# EAGLE board 3x3 (EAGLE 9.6.2)
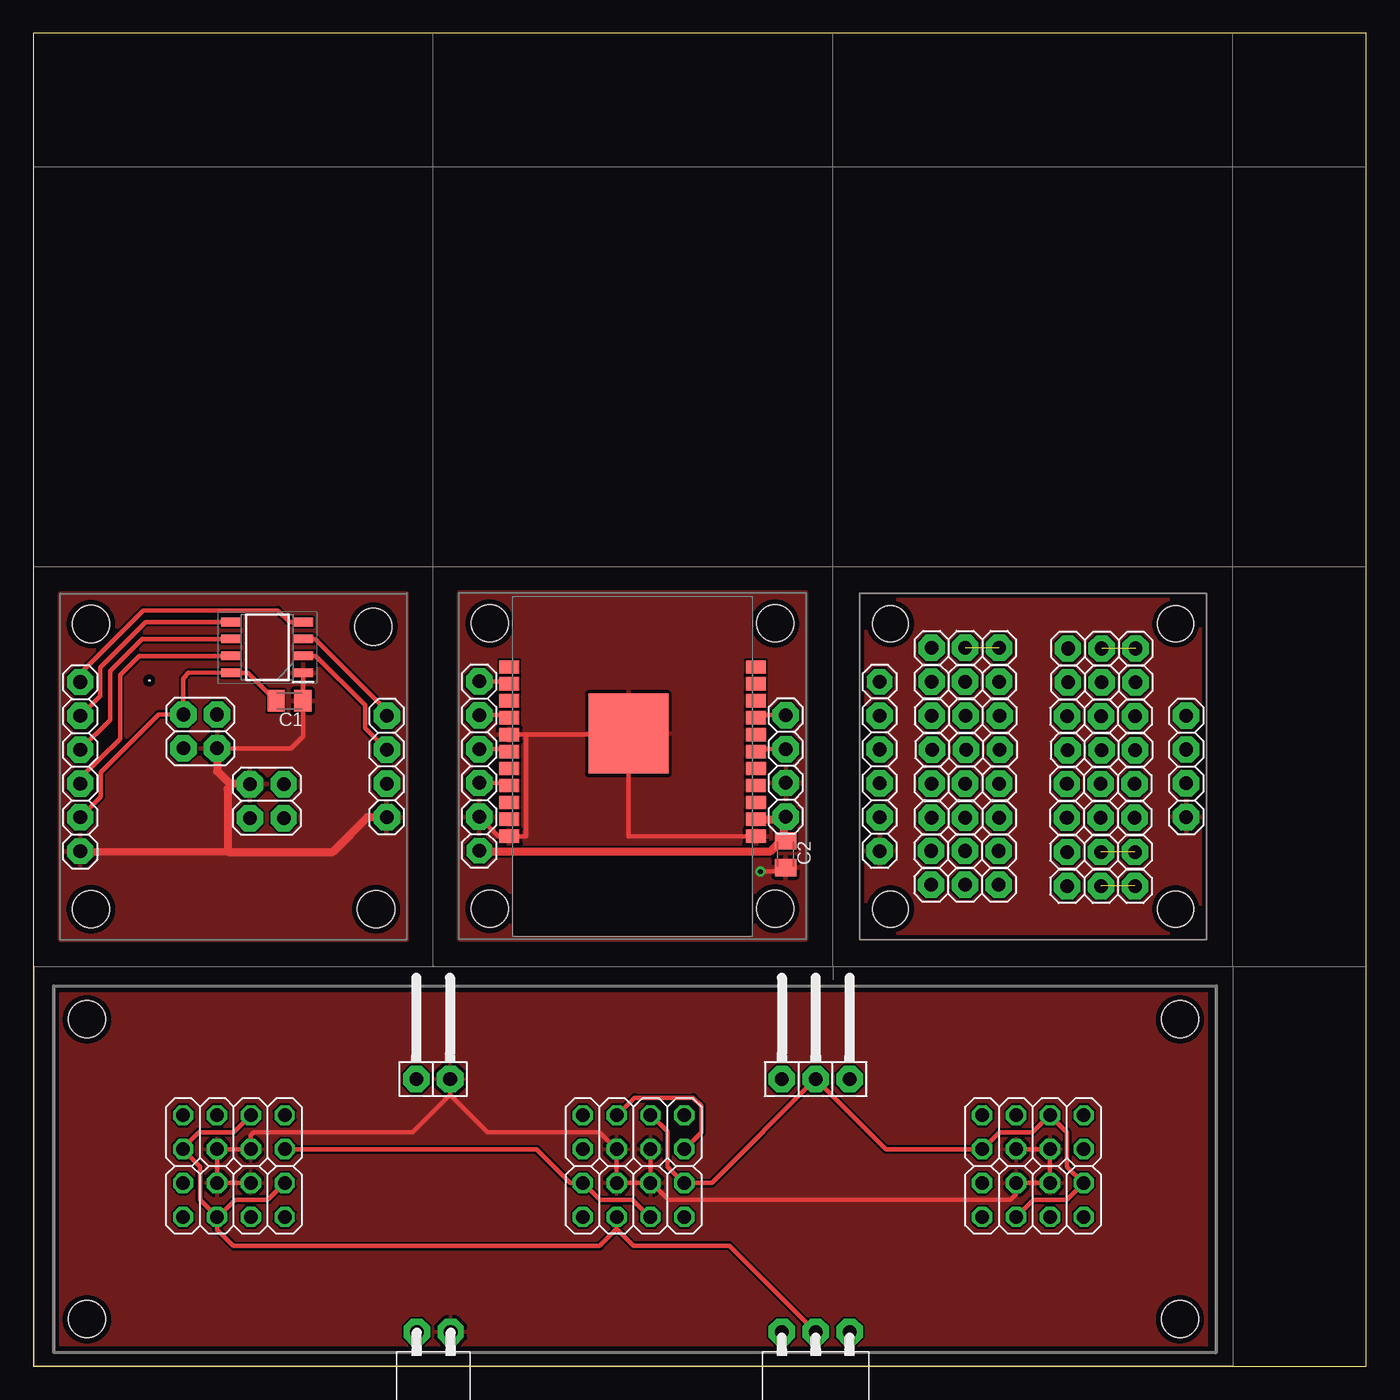
[diagram p0: board, top side]
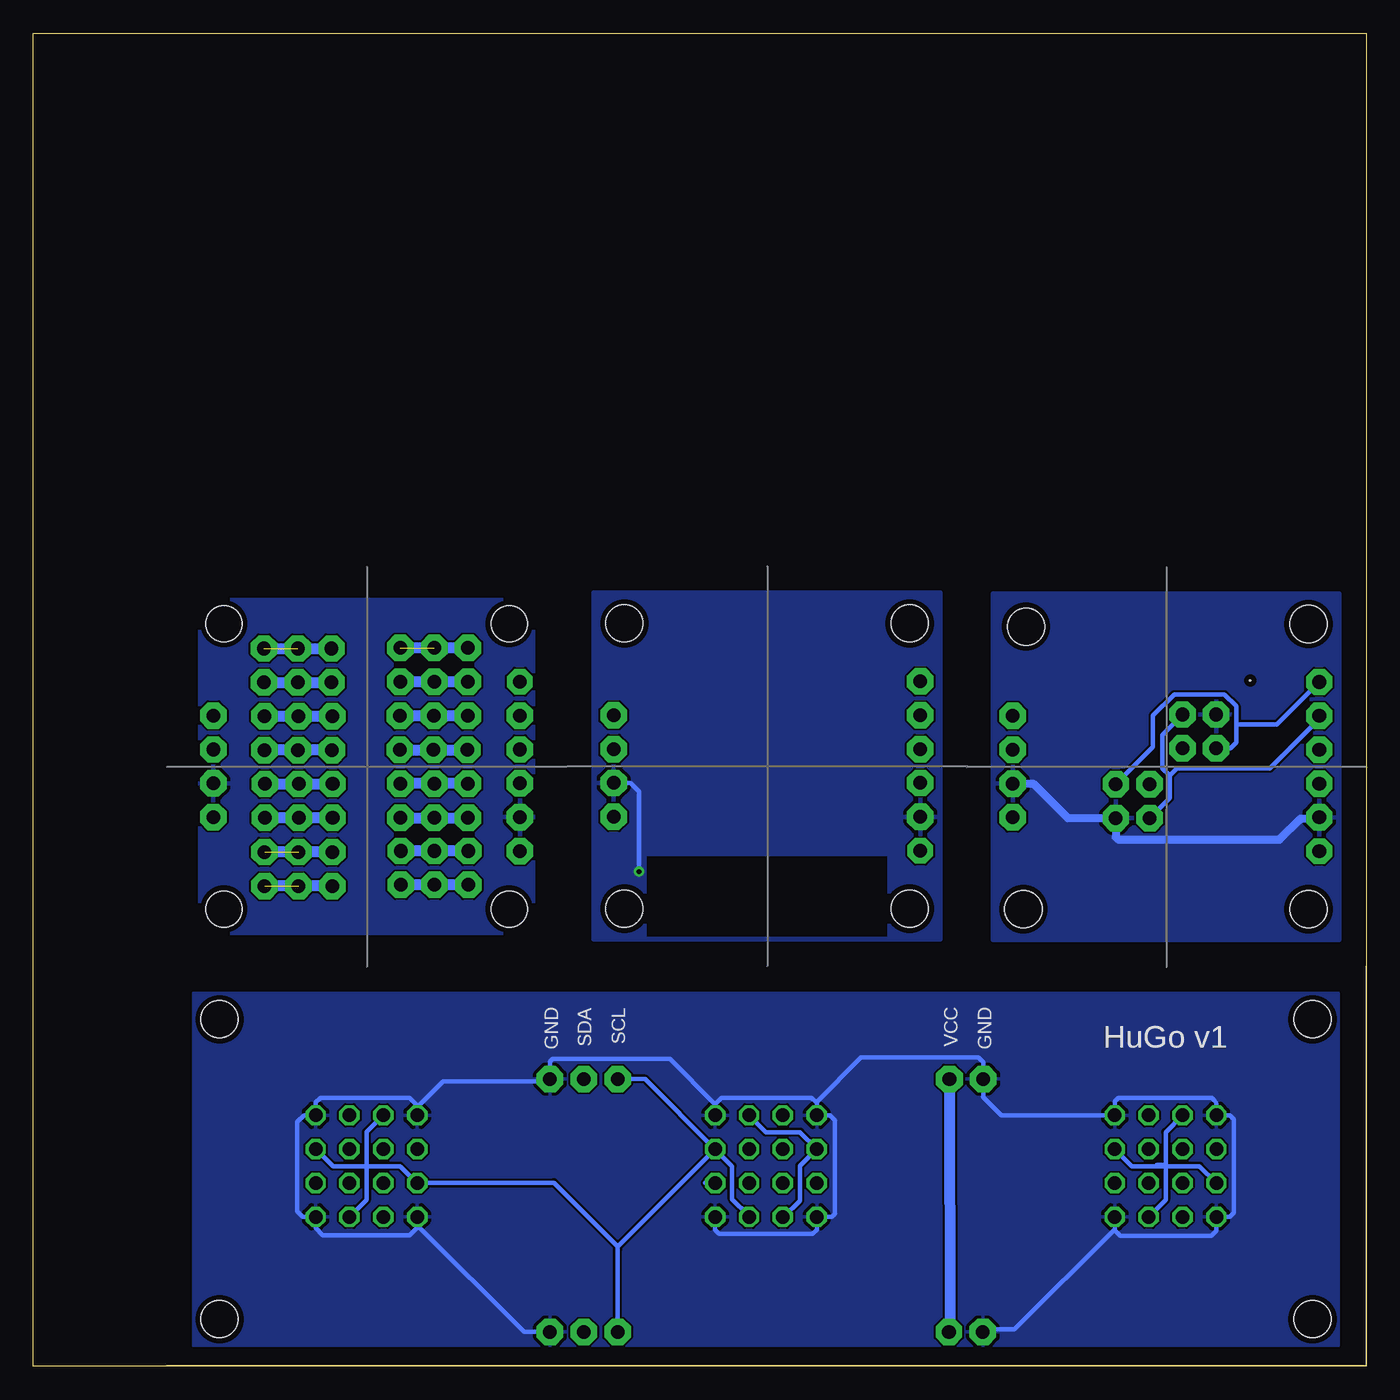
[diagram p1: board, bottom side, seen from below]

Size 100 x 100 mm. Coordinates in mm from the lower left corner, seen from the top.
Outline: 90.03,0.03 0.03,0.03 0.03,30.02
Outline: 0,0 100,0 100,100 0,100 0,0
Copper layers (1*16): Top 0.035mm / dielectric 1.5mm / Bottom 0.035mm
Design rules "default *": minimum track width 6mil, minimum drill 0.35mm, track to track 6mil, track to pad 6mil, pad to pad 6mil, via to via 6mil, smd to smd 6mil, copper to edge 16mil, drill to drill 6mil, minimum pad ring 10mil, minimum via ring 8mil, stop-mask expansion 4mil, vias tented up to drill 0mil, thermal gap 10mil
Holes 2.8 mm at 86.03,3.53 86.03,26.03 4.03,26.03 4.03,3.53 4.32,34.28 25.52,55.48 25.72,34.28 4.32,55.68 34.25,34.33 55.65,55.73 55.65,34.33 34.25,55.73
Holes 0.08 mm at 8.7,51.44
Holes 2.7 mm at 64.3,34.3 85.7,55.7 85.7,34.3 64.3,55.7

## Footprints (pad centres in the part's own frame; a part is rotated, then mirrored left to right if it is on the bottom)
C0805K = smd 1.3 x 1.6: 1 -1,0; 2 1,0
SOIC127P600X175-8N = smd 1.5 x 0.65: 1 -2.7,1.905; 2 -2.7,0.635; 3 -2.7,-0.635; 4 -2.7,-1.905; 5 2.7,-1.905; 6 2.7,-0.635; 7 2.7,0.635; 8 2.7,1.905
2X04 = drill 1.016 octagon: 1 -3.81,-1.27; 2 -3.81,1.27; 3 -1.27,-1.27; 4 -1.27,1.27; 5 1.27,-1.27; 6 1.27,1.27; 7 3.81,-1.27; 8 3.81,1.27
1X02/90 = drill 1.016 pad 1.981 octagon: 1 -1.27,-3.81 | drill 1.016 pad 2.007 octagon: 2 1.27,-3.81
1X03/90 = drill 1.016 pad 1.981 octagon: 1 -2.54,-3.81; 2 0,-3.81; 3 2.54,-3.81
1X03/90F = drill 1.016 pad 1.981 octagon: 1 -2.54,0; 2 0,0; 3 2.54,0
1X02/90F = drill 1.016 pad 1.981 octagon: 1 -1.31,0; 2 1.23,0
1X04 = drill 1.016 pad 1.981 octagon: 1 -3.81,0; 2 -1.27,0; 3 1.27,0; 4 3.81,0
1X06 = drill 1.016 pad 1.93 octagon: 1 -6.35,0 | drill 1.016 pad 1.981 octagon: 2 -3.81,0; 3 -1.27,0; 4 1.27,0; 5 3.81,0; 6 6.35,0
2X02 = drill 1.016 pad 1.981 octagon: 1 -1.27,-1.27; 2 -1.27,1.27; 3 1.27,-1.27; 4 1.27,1.27
1X03 = drill 1.016 pad 1.981 octagon: 1 -2.54,0; 2 0,0; 3 2.54,0
ESP-WROOM-32-TINY-BLOCK = smd 1.5 x 1: 1 -9.25,8.27; 2 -9.25,7; 3 -9.25,5.73; 4 -9.25,4.46; 5 -9.25,3.19; 6 -9.25,1.92; 7 -9.25,0.65; 8 -9.25,-0.62; 9 -9.25,-1.89; 10 -9.25,-3.16; 11 -9.25,-4.43; 28 9.25,-4.43; 29 9.25,-3.16; 30 9.25,-1.89; 31 9.25,-0.62; 32 9.25,0.65; 33 9.25,1.92; 34 9.25,3.19; 35 9.25,4.46; 36 9.25,5.73; 37 9.25,7; 38 9.25,8.27 | smd 6 x 6: GND 0.3,0.57

## Placement (x,y rotation side)
C1  [C0805K]  19.22,49.91 180 top
C2  [C0805K]  56.44,38.4 270 top
IC1  ATTINY412-SSN  [SOIC127P600X175-8N]  17.56,53.93 180 top
JP1  [2X04]  15.05,17.55 180 top
JP2  [2X04]  15.05,12.47 180 top
JP3  [2X04]  45.03,17.55 180 top
JP4  [2X04]  45.03,12.47 180 top
JP5  [2X04]  75.01,17.55 180 top
JP6  [2X04]  75.01,12.47 180 top
JP7  [1X02/90]  30,25.35 0 top
JP8  [1X03/90]  58.7,25.35 0 top
JP9  [1X03/90F]  58.7,2.57 180 top
JP10  [1X02/90F]  30,2.57 180 top
JP11  [1X04]  26.52,44.98 270 top
JP12  [1X06]  3.52,44.98 90 top
JP13  [2X02]  17.51,42.4 270 top
JP14  [2X02]  12.52,47.62 270 top
JP15  [1X04]  56.45,45.03 270 top
JP16  [1X06]  33.45,45.03 90 top
JP17  [1X04]  86.5,45 90 top
JP18  [1X06]  63.5,45 270 top
JP19  [1X03]  69.92,51.35 0 top
JP20  [1X03]  80.16,51.3 0 top
JP21  [1X03]  69.95,48.79 0 top
JP22  [1X03]  80.11,48.76 0 top
JP23  [1X03]  69.98,46.25 0 top
JP24  [1X03]  80.14,46.22 0 top
JP25  [1X03]  69.92,43.71 0 top
JP26  [1X03]  80.08,43.68 0 top
JP27  [1X03]  69.92,41.14 0 top
JP28  [1X03]  80.08,41.14 0 top
JP29  [1X03]  69.9,38.65 0 top
JP30  [1X03]  69.9,36.11 0 top
JP31  [1X03]  80.11,38.58 0 top
JP32  [1X03]  80.11,36.01 0 top
JP33  [1X03]  69.92,53.89 0 top
JP34  [1X03]  80.16,53.84 0 top
U$1  ESP-WROOM-32-TINY-BLOCK  [ESP-WROOM-32-TINY-BLOCK]  44.95,48.03 180 top

## Library data of the parts
C1 C2 = rcl; SPICEPREFIX: C
IC1 = ATTINY412-SSN; DESCRIPTION: 8-bit Microcontrollers - MCU 20MHz, 4KB, SOIC8, Ind 105C, Green, Tube; HEIGHT: 1.75mm; MANUFACTURER_NAME: Microchip; MANUFACTURER_PART_NUMBER: ATTINY412-SSN; MOUSER_PART_NUMBER: 579-ATTINY412-SSN; MOUSER_PRICE-STOCK: https://www.mouser.co.uk/ProductDetail/Microchip-Technology/ATTINY412-SSN?qs=3HJ2avRr9PItQG9ZsCamPQ%3D%3D
JP1-JP34 = pinhead2
U$1 = esp32

## Nets
GND: JP1.1 JP1.7 JP2.2 JP2.8 JP3.1 JP3.7 JP4.2 JP4.8 JP5.1 JP5.7 JP6.2 JP6.8 JP7.1 JP8.3 JP9.1 JP10.2
GND1: C1.2 IC1.8 JP11.3 JP12.2 JP13.4 JP14.1
GND2: C2.2 JP15.3 JP16.2 U$1.1 U$1.32 U$1.38 U$1.GND
GND3: JP17.2 JP18.5
N$1: JP33.1 JP33.2 JP33.3
N$2: JP31.1 JP31.2 JP31.3
N$3: JP29.1 JP29.2 JP29.3
N$4: JP27.1 JP27.2 JP27.3
N$5: JP25.1 JP25.2 JP25.3
N$6: JP23.1 JP23.2 JP23.3
N$7: JP21.1 JP21.2 JP21.3
N$8: JP19.1 JP19.2 JP19.3
N$9: JP20.1 JP20.2 JP20.3
N$10: JP22.1 JP22.2 JP22.3
N$11: JP24.1 JP24.2 JP24.3
N$12: JP26.1 JP26.2 JP26.3
N$13: JP28.1 JP28.2 JP28.3
N$14: JP30.1 JP30.2 JP30.3
N$15: JP32.1 JP32.2 JP32.3
N$16: JP34.1 JP34.2 JP34.3
P0: IC1.2 JP11.2
P1: IC1.3 JP11.1
P2: JP15.2 U$1.6
P3: JP15.1 U$1.8
P4: IC1.7 JP12.3
P5: JP16.3 U$1.35
SCL: JP1.2 JP1.5 JP2.4 JP2.7 JP3.2 JP3.5 JP4.4 JP4.7 JP5.2 JP5.5 JP6.4 JP6.7 JP8.1 JP9.3
SCL1: IC1.5 JP12.5 JP13.3 JP14.2
SCL2: JP16.5 U$1.31
SDA: JP1.3 JP1.8 JP2.1 JP2.6 JP3.3 JP3.8 JP4.1 JP4.6 JP5.3 JP5.8 JP6.1 JP6.6 JP8.2 JP9.2
SDA1: IC1.4 JP12.6 JP13.2 JP14.3
SDA2: JP16.6 U$1.29
UPDI: IC1.6 JP12.4
UPDI1: JP16.4 U$1.33
VCC: JP1.4 JP1.6 JP2.3 JP2.5 JP3.4 JP3.6 JP4.3 JP4.5 JP5.4 JP5.6 JP6.3 JP6.5 JP7.2 JP10.1
VCC1: C2.1 JP15.4 JP16.1 U$1.2
VCC2: JP17.1 JP18.6
VDD: C1.1 IC1.1 JP11.4 JP12.1 JP13.1 JP14.4

## Tracks (layer width: path | path; a pad name or v marks a point on that pad's centre or on a via)
GND
  Bottom 0.356: JP3.7 41.22,19.76 41.6,20.14 48.36,20.14 48.84,19.66 | JP3.7 40.23,18.82 39.85,18.44 39.85,11.43 40.08,11.2 JP4.8 41.22,10.24 41.53,9.93 48.54,9.93 48.84,10.24 JP4.2 | JP10.2 28.68,2.77 26.39,2.77 18.87,10.29 18.86,10.33 JP2.2 18.86,10.2 18.44,9.78 11.63,9.78 11.24,10.17 JP2.8 10.22,11.2 9.93,11.49 9.93,18.53 10.22,18.82 JP1.7 11.24,19.71 11.39,19.95 11.58,20.14 18.59,20.14 18.86,19.88 JP1.1 27.36,18.82 28.75,20.22 28.73,20.22 JP7.1 28.7,22.78 29.08,23.16 37.9,23.16 41.22,19.84 JP3.7 | JP3.1 48.84,19.66 | 48.84,19.66 52.25,23.06 61.04,23.06 61.24,22.86 JP8.3 61.24,21.36 69.24,21.36 71.2,19.41 JP5.7 71.2,19.56 71.78,20.14 78.46,20.14 78.82,19.79 JP5.1 79.68,18.82 80.19,18.31 80.19,11.61 79.78,11.2 JP6.2 78.82,10.36 78.28,9.83 71.75,9.83 71.2,10.39 JP6.8 71.2,10.57 63.2,2.56 JP9.1
  pour Bottom: 2.03,27.99 88.06,27.99 88.06,1.55 2.03,1.55
GND1
  Top 0.356: 14.84,52 11.66,52.03 11.25,51.61 JP14.1 9.39,48.89 5.04,44.54 5.04,42.7 JP12.2 | C1.2 16.11,52.02 IC1.8
  Top 0.61: IC1.8 14.84,52
  Bottom 0.61: JP11.3 24.98,43.71 24.98,43.72 22.39,41.13 JP13.4 18.78,39.69 18.59,39.5 6.5,39.5 4.92,41.09 3.56,41.09 JP12.2
  pour Bottom: 2.02,57.98 2.02,31.98 28.02,31.98 28.02,57.98
GND2  (via drill 0.35)
  Top 0.356: U$1.1 44.65,39.76 U$1.GND 44.65,47.38 U$1.32 36.96,47.38 36.96,39.76 U$1.38 34.91,39.76 JP16.2 | v54.56,37.11 56.14,37.11 C2.2
  Top 0.61: 54.58,37.12 v54.56,37.11
  Bottom 0.356: v54.56,37.11 54.56,43.13 55.18,43.76 JP15.3
  pour Top: 31.95,58.03 57.95,58.03 57.95,32.03 31.95,32.03
  pour Bottom: 31.95,58.03 57.95,58.03 57.95,32.03 31.95,32.03
GND3
  pour Bottom: 62.5,57.5 62.5,32.5 87.5,32.5 87.5,57.5
N$1  (1 unrouted)
  Bottom 0.813: JP33.1 JP33.3
N$2  (1 unrouted)
  Bottom 0.813: JP31.1 JP31.3
N$3
  Bottom 0.813: JP29.1 JP29.2 JP29.3
N$4
  Bottom 0.813: JP27.3 JP27.2 JP27.1
N$5
  Bottom 0.813: JP25.1 JP25.2 JP25.3
N$6
  Bottom 0.813: JP23.3 JP23.2 JP23.1
N$7
  Bottom 0.813: JP21.1 JP21.2 JP21.3
N$8
  Bottom 0.813: JP19.3 JP19.2 JP19.1
N$9
  Bottom 0.813: JP20.3 JP20.2 JP20.1
N$10
  Bottom 0.813: JP22.3 JP22.2 JP22.1
N$11
  Bottom 0.813: JP24.1 JP24.2 JP24.3
N$12
  Bottom 0.813: JP26.3 JP26.2 JP26.1
N$13
  Bottom 0.813: JP28.1 JP28.2 JP28.3
N$14
  Bottom 0.813: JP30.1 JP30.2 JP30.3
N$15  (1 unrouted)
  Bottom 0.813: JP32.1 JP32.3
N$16  (1 unrouted)
  Bottom 0.813: JP34.3 JP34.1
P0
  Top 0.356: JP11.2 24.89,47.88 24.89,49.6 21.18,53.29 IC1.2
P1
  Top 0.356: IC1.3 21.14,54.56 26.52,49.18 JP11.1
P2
  Top 0.356: JP15.2 54.39,46.3 U$1.6
P3
  Top 0.356: JP15.1 54.39,48.84 U$1.8
P4
  Top 0.356: JP12.3 3.52,44.14 6.53,47.06 6.53,51.87 7.95,53.29 IC1.7
P5
  Top 0.356: JP16.3 35.51,43.76 U$1.35
SCL
  Top 0.356: JP4.4 46.18,11.25 44.96,12.47 42.52,12.47 41.25,13.74 JP4.7 | JP3.5 43.79,18.82 45.11,20.14 49.51,20.14 50.11,19.53 50.11,17.55 JP3.2 | 41.17,13.74 40.28,13.74 37.74,16.28 JP1.2 | 41.17,13.74 JP4.7 | JP4.7 41.22,13.69 | 41.17,13.63 41.17,13.74
  Bottom 0.356: 71.35,13.74 JP6.7 | JP5.5 73.76,18.82 75.01,17.58 75.01,15.01 | 75.01,15.01 77.52,15.01 78.74,16.23 JP5.2 | JP4.4 46.35,11.3 47.57,12.52 47.57,15.01 JP3.2 | JP2.7 12.51,15.01 15.79,15.01 | JP1.5 15.05,17.55 15.05,15.09 | JP2.4 15.05,12.47 15.05,15.09 | 15.79,15.01 15.72,15.09 15.05,15.09 | JP1.2 17.59,15.01 15.79,15.01 | JP6.4 75.01,12.47 75.01,15.01 | JP6.7 71.23,13.74 72.5,15.01 75.01,15.01 | 56.16,8.77 JP9.3 56.16,8.97 | JP6.7 71.17,13.77 60.95,13.77 56.16,8.98 56.16,8.97 | JP8.1 54.1,21.54 JP3.2 | JP3.2 56.16,8.97
SCL1
  Top 0.356: 14.82,55.78 IC1.5 8.43,55.83 5.02,52.42 5.02,50.29 JP12.5
  Bottom 0.356: JP14.2 13.79,48.85 15.29,47.36 15.29,44.84 14.74,44.3 | JP13.3 14.74,42.62 14.74,44.3 | 14.74,44.3 14.19,44.86 7.22,44.86 3.52,48.56 JP12.5
SCL2
  Top 0.356: JP16.5 35.7,48.84 U$1.31
SDA
  Top 0.356: JP6.6 75.03,12.47 77.55,12.47 JP6.1 78.77,13.74 77.55,14.97 77.55,17.55 JP5.3 76.24,18.82 74.97,17.55 72.47,17.55 JP5.8 63.96,16.28 JP8.2 50.9,13.74 JP4.1 48.79,13.74 47.57,14.96 47.57,17.6 46.35,18.82 JP3.3 | 43.76,10.34 JP4.6 43.76,10.29 | JP2.6 13.78,10.24 15.01,9.02 42.49,9.02 43.76,10.29 | JP2.1 17.59,12.47 15.13,12.47 13.86,11.2 JP2.6 | JP2.6 12.51,12.47 12.51,14.95 11.24,16.22 JP1.8 11.24,16.38 12.41,17.55 15.05,17.55 JP1.3 | 43.76,10.29 45.02,9.04 52.22,9.04 JP9.2
  Bottom 0.356: 13.8,11.21 JP2.6 | 49.61,13.74 JP4.1 | JP4.6 43.71,11.2 42.49,12.42 42.49,15.04 41.25,16.28 JP3.8 41.22,16.3 42.48,17.55 45.03,17.55 JP3.3
SDA1
  Top 0.356: JP12.6 3.52,51.97 8.25,56.71 18.34,56.71 19.21,55.83 IC1.4
  Bottom 0.356: 9.75,48.77 9.75,49.52 10.63,50.39 14.41,50.39 16,48.8 16,46.45 JP13.2 | 9.75,48.77 9.75,48.27 | 9.75,48.27 9.75,46.8 10.2,46.35 JP14.3 | 9.73,48.79 9.75,48.77 | JP12.6 6.71,48.14 9.62,48.14 9.75,48.27
SDA2
  Top 0.356: JP16.6 35.7,51.38 U$1.29
UPDI
  Top 0.356: JP12.4 5.75,48.49 5.75,52.15 8.18,54.56 IC1.6
UPDI1
  Top 0.356: JP16.4 35.7,46.3 U$1.33
VCC
  Top 0.356: JP2.3 JP2.5 JP1.6 JP1.4 16.32,17.32 16.55,17.55 28.47,17.55 31.27,20.34 | 31.27,20.34 31.28,20.36 | 31.27,20.34 JP7.2 | JP5.6 JP5.4 JP6.3 JP6.5 73.74,12.9 73.3,12.47 47.65,12.47 46.38,13.74 JP4.3 | JP4.3 JP4.5 JP3.6 42.49,17.55 34.07,17.55 31.27,20.34 | JP4.3 JP3.4
  Bottom 0.406: 31.24,2.64 JP10.1
  Bottom 0.813: JP7.2 31.24,2.64
  pour Top: 2.03,27.99 88.06,27.99 88.06,1.55 2.03,1.55
VCC1
  Top 0.152: C2.1 56.44,41.03 56.26,41.03
  Top 0.356: 54.39,41.22 U$1.2
  Top 0.61: U$1.2 56.26,41.03 JP15.4 56.33,41.09 56.33,39.66 55.29,38.62 33.67,38.62 33.62,38.68 JP16.1
VCC2
  pour Top: 62.5,57.5 62.5,32.5 87.5,32.5 87.5,57.5
VDD
  Top 0.356: IC1.1 20.26,50.09 | JP14.4 19.34,46.35 20.23,47.25 20.23,49.66 20.21,49.68 C1.1
  Top 0.61: 20.26,50.09 20.23,50.06 20.23,49.66 | 13.79,46.4 JP14.4 13.79,44.65 14.78,43.67 JP13.1 14.92,43.67 14.57,43.31 14.57,38.59 | JP12.1 14.57,38.59 | 14.57,38.59 22.49,38.59 25.03,41.17 JP11.4
  pour Top: 2.02,57.98 2.02,31.98 28.02,31.98 28.02,57.98

## Text on the board
bNames: GND | VCC | SCL | SDA | GND | HuGo v1
bDocu: SDA | A | SCL | L | 1 | P1 | UPDI | I | 0 | P4 | P0 | 4 | - | GND | GND | GND | GND | - | + | VCC | VCC | VCC | VCC | +